# Altium PCB WUT-YJ-4-3-1.PcbDoc (part 10 of 11)
Units mm, origin at the board's own origin, x right, y up, seen from the top; angles counter-clockwise.
Board outline 85 x 56 mm, 4 copper layers (Top Layer, GND_Plane, 3V3_Plane, Bottom Layer); 182 components, 321 nets, 1106 pads, 360 vias.
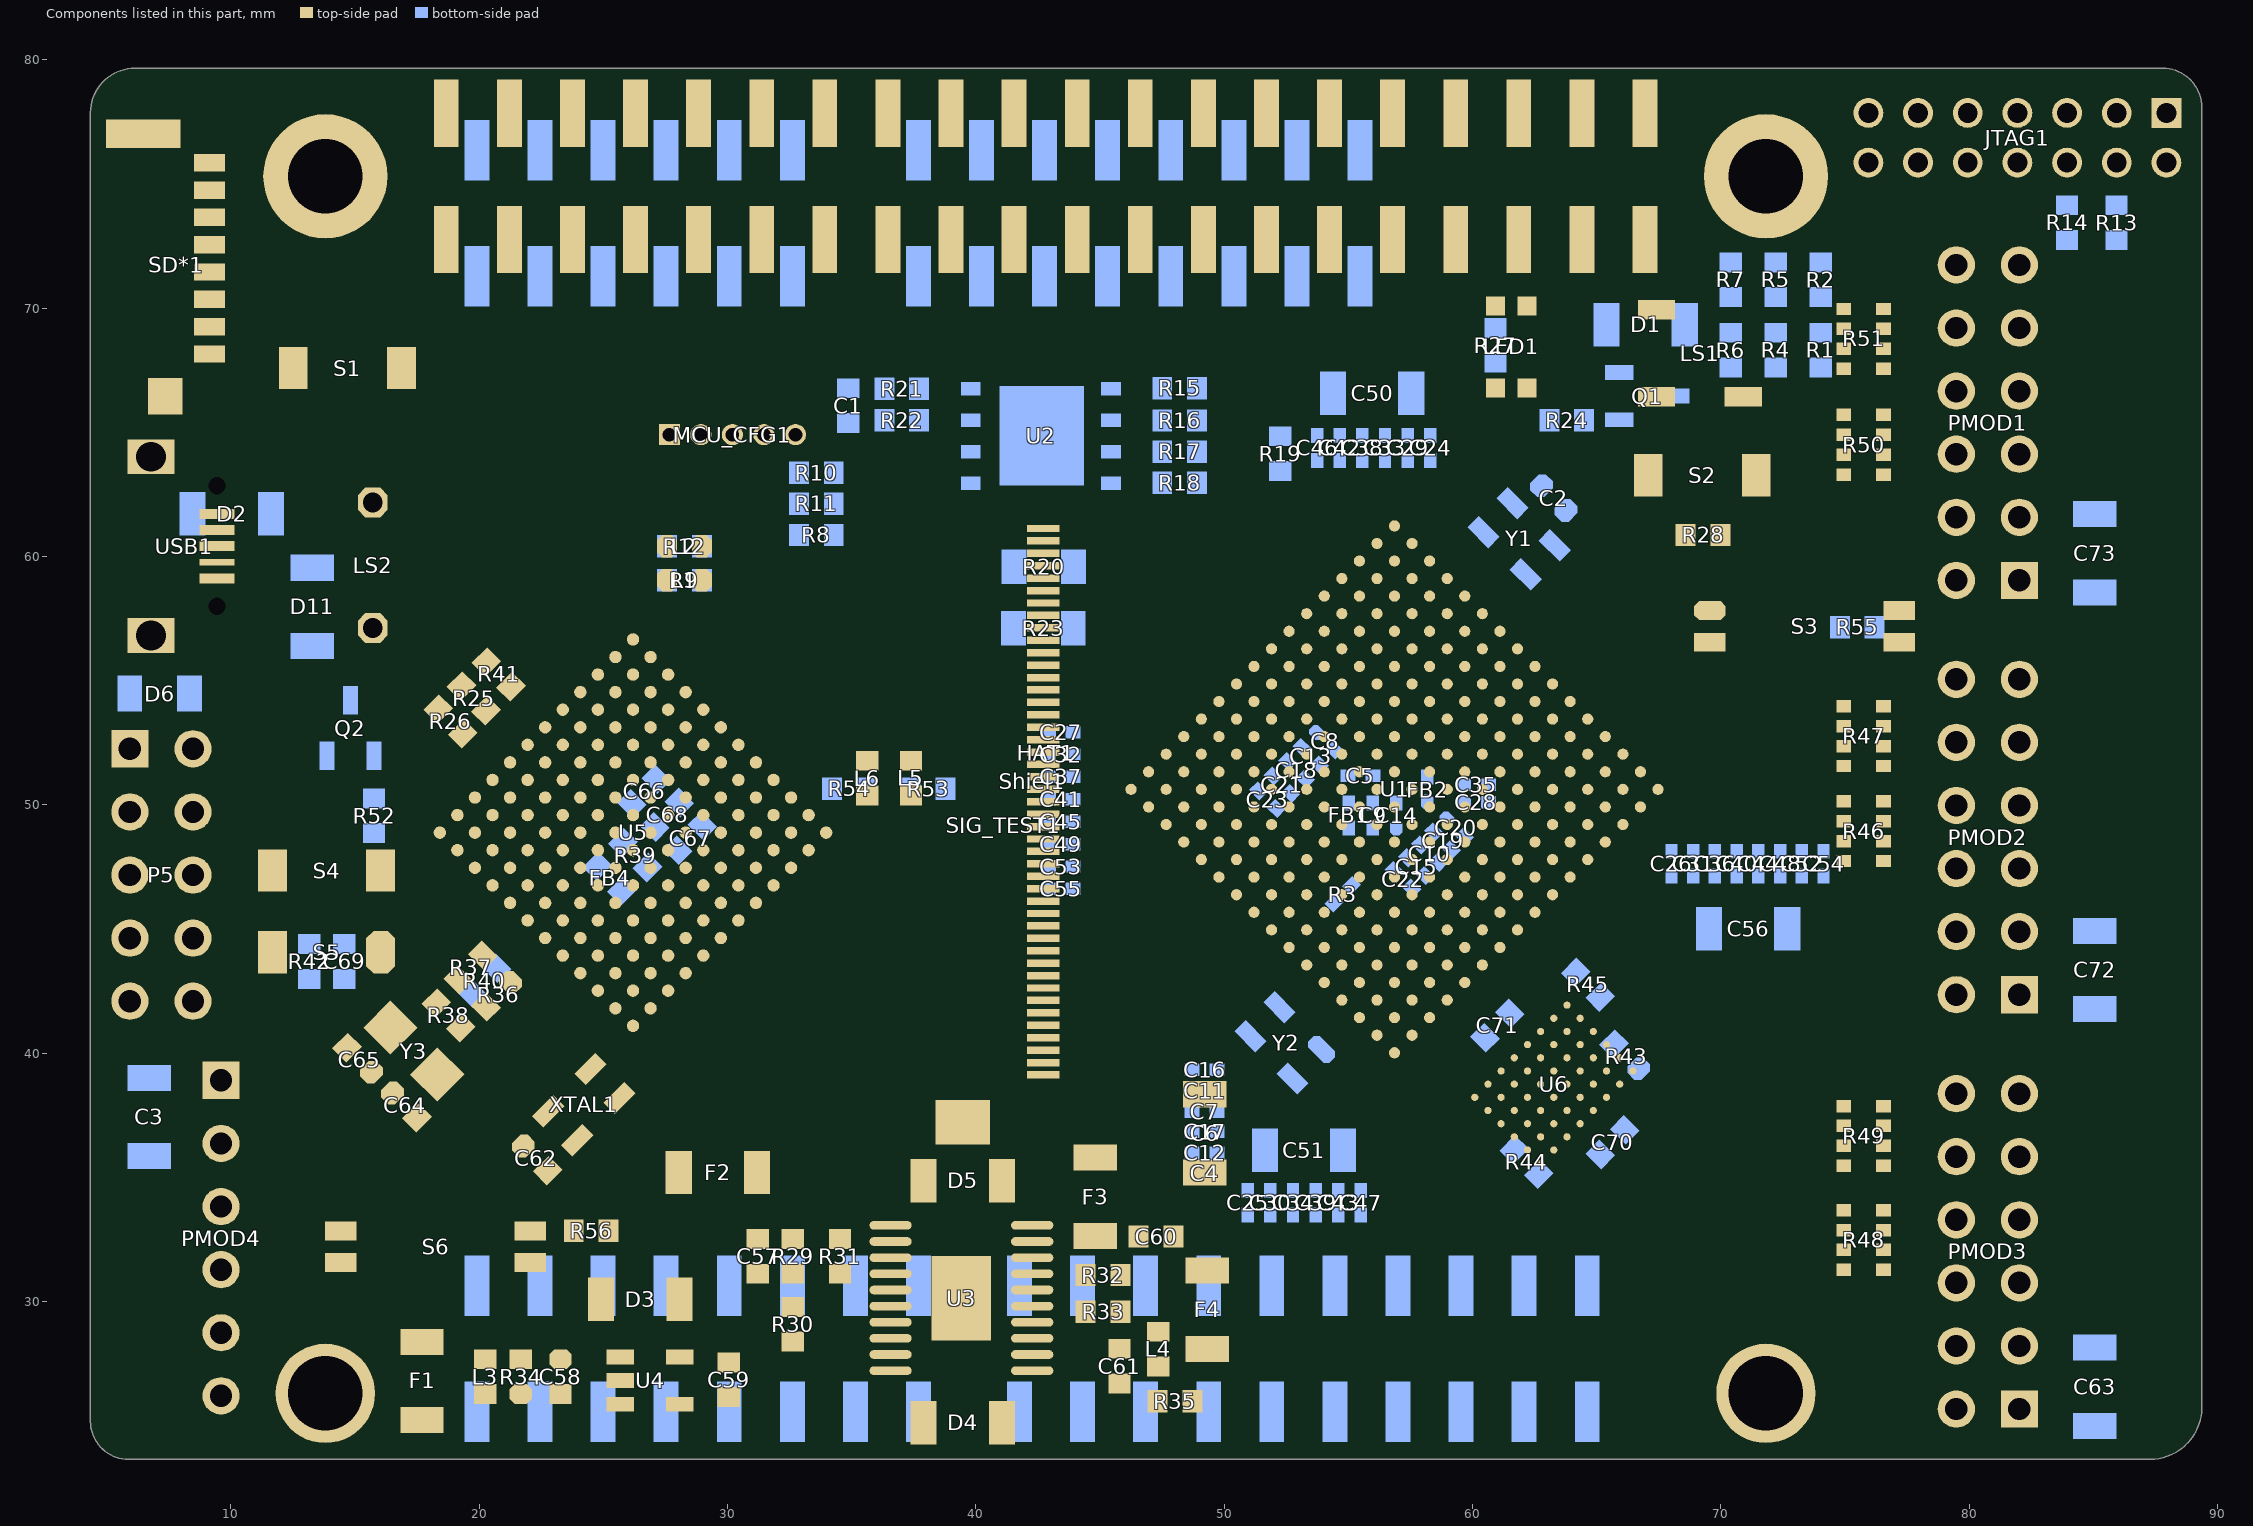
[diagram p12: the components of this part, seen from the top]

## Via types
v1: diameter 0.45, hole 0.2, Top Layer to Bottom Layer, tented both sides, 280 vias
v2: diameter 0.61, hole 0.33, Top Layer to Bottom Layer, tented both sides, 40 vias
v3: diameter 0.403, hole 0.2, Top Layer to Bottom Layer, tented both sides, 15 vias
v4: diameter 0.5, hole 0.2, Top Layer to Bottom Layer, tented both sides, 12 vias
v5: diameter 0.864, hole 0.508, Top Layer to Bottom Layer, tented both sides, 11 vias
v6: diameter 0.864, hole 0.356, Top Layer to Bottom Layer, tented both sides, 1 vias
v7: diameter 0.864, hole 0.381, Top Layer to Bottom Layer, tented both sides, 1 vias

## Nets (pads, with @x,y where several pads share a name; then routed paths per layer and width w, separated by ;. In a path a pad name is that pad's centre, name@x,y a point inside that pad or via, vN(x,y) a via of type N, cw(c..) or ccw(c..) an arc to the next point about the centre after c; other vN are vias at no path point) (continued)
copper on no net: (continued)
  Top Layer w0.025: 86.169,52.752 86.169,52.76 ; 86.169,68.373 86.169,68.406 ; 86.195,50.44 86.195,50.601 ; 86.195,52.777 86.195,52.811 ; 86.195,52.904 86.195,53.065 ; 86.195,68.322 86.195,68.483 ; 86.22,50.44 86.22,50.652 ; 86.22,52.777 86.22,53.116 ; 86.22,68.322 86.22,68.508 ; 86.246,50.516 86.246,50.677 ; 86.246,52.828 86.246,53.141 ; 86.246,68.423 86.246,68.533 ; 86.271,49.399 86.271,49.407 ; 86.271,50.542 86.271,50.703 ; 86.271,52.853 86.271,53.166 ; 86.271,64.791 86.271,64.8 ; 86.271,68.449 86.271,68.584 ; 86.296,49.424 86.296,49.433 ; 86.296,50.567 86.296,50.728 ; 86.296,52.879 86.296,53.141 ; 86.296,59.432 86.296,59.593 ; 86.296,64.817 86.296,64.85 ; 86.296,68.449 86.296,68.635 ; 86.322,49.424 86.322,49.458 ; 86.322,50.567 86.322,50.753 ; 86.322,52.904 86.322,53.116 ; 86.322,59.381 86.322,59.618 ; 86.322,64.817 86.322,64.876 ; 86.322,68.449 86.322,68.635 ; 86.347,47.164 86.347,47.172 ; 86.347,49.45 86.347,49.458 ; 86.347,50.567 86.347,50.779 ; 86.347,52.904 86.347,53.039 ; 86.347,59.33 86.347,59.669 ; 86.347,64.842 86.347,64.927 ; 86.347,67.915 86.347,68.051 ; 86.347,68.449 86.347,68.66 ; 86.373,47.011 86.373,47.274 ; 86.373,49.45 86.373,49.509 ; 86.373,50.567 86.373,50.779 ; 86.373,52.904 86.373,52.963 ; 86.373,59.33 86.373,59.694 ; 86.373,64.842 86.373,64.952 ; 86.373,67.966 86.373,68.127 ; 86.373,68.449 86.373,68.787 ; 86.398,46.935 86.398,47.299 ; 86.398,49.45 86.398,49.56 ; 86.398,49.907 86.398,50.017 ; 86.398,50.567 86.398,50.779 ; 86.398,52.879 86.398,52.938 ; 86.398,53.031 86.398,53.141 ; 86.398,58.898 86.398,59.008 ; 86.398,59.305 86.398,59.339 ; 86.398,59.533 86.398,59.72 ; 86.398,64.842 86.398,65.003 ; 86.398,67.992 86.398,68.127 ; 86.398,68.449 86.398,68.838 ; 86.423,46.808 86.423,47.324 ; 86.423,49.475 86.423,49.585 ; 86.423,49.958 86.423,50.118 ; 86.423,50.542 86.423,50.779 ; 86.423,52.853 86.423,53.217 ; 86.423,58.848 86.423,59.059 ; 86.423,59.279 86.423,59.313 ; 86.423,59.559 86.423,59.745 ; 86.423,64.817 86.423,65.003 ; 86.423,67.992 86.423,68.127 ; 86.423,68.347 86.423,68.838 ; 86.449,46.732 86.449,47.35 ; 86.449,49.475 86.449,49.61 ; 86.449,49.983 86.449,50.144 ; 86.449,50.542 86.449,50.753 ; 86.449,52.828 86.449,53.243 ; 86.449,58.924 86.449,59.085 ; 86.449,59.254 86.449,59.288 ; 86.449,59.584 86.449,59.77 ; 86.449,64.817 86.449,65.028 ; 86.449,65.223 86.449,65.257 ; 86.449,68.017 86.449,68.152 ; 86.449,68.246 86.449,68.838 ; 86.474,46.605 86.474,47.375 ; 86.474,49.475 86.474,49.636 ; 86.474,50.008 86.474,50.169 ; 86.474,50.542 86.474,50.728 ; 86.474,52.777 86.474,53.217 ; 86.474,58.975 86.474,59.135 ; 86.474,59.254 86.474,59.262 ; 86.474,59.584 86.474,59.77 ; 86.474,64.791 86.474,65.028 ; 86.474,65.248 86.474,65.333 ; 86.474,68.042 86.474,68.838 ; 86.5,46.478 86.5,47.401 ; 86.5,49.45 86.5,49.661 ; 86.5,50.008 86.5,50.169 ; 86.5,50.516 86.5,50.728 ; 86.5,52.625 86.5,53.217 ; 86.5,59.025 86.5,59.186 ; 86.5,59.229 86.5,59.262 ; 86.5,59.584 86.5,59.796 ; 86.5,64.766 86.5,65.028 ; 86.5,65.248 86.5,65.435 ; 86.5,68.017 86.5,68.813 ; 86.525,46.376 86.525,46.385 ; 86.525,46.452 86.525,46.994 ; 86.525,47.087 86.525,47.401 ; 86.525,49.45 86.525,49.661 ; 86.525,50.034 86.525,50.169 ; 86.525,50.516 86.525,50.703 ; 86.525,52.65 86.525,53.192 ; 86.525,59.051 86.525,59.237 ; 86.525,59.61 86.525,59.821 ; 86.525,64.74 86.525,65.028 ; 86.525,65.248 86.525,65.435 ; 86.525,67.941 86.525,68.762 ; 86.55,43.836 86.55,43.845 ; 86.55,46.554 86.55,46.893 ; 86.55,47.087 86.55,47.375 ; 86.55,49.45 86.55,49.661 ; 86.55,50.034 86.55,50.169 ; 86.55,50.516 86.55,50.703 ; 86.55,52.675 86.55,53.166 ; 86.55,59.102 86.55,59.262 ; 86.55,59.61 86.55,59.821 ; 86.55,62.124 86.55,62.133 ; 86.55,64.74 86.55,65.003 ; 86.55,65.248 86.55,65.46 ; 86.55,67.839 86.55,68.559 ; 86.576,43.836 86.576,43.895 ; 86.576,46.63 86.576,46.766 ; 86.576,47.087 86.576,47.35 ; 86.576,49.424 86.576,49.636 ; 86.576,50.034 86.576,50.169 ; 86.576,50.516 86.576,50.703 ; 86.576,50.745 86.576,50.83 ; 86.576,52.726 86.576,53.217 ; 86.576,59.102 86.576,59.313 ; 86.576,59.61 86.576,59.821 ; 86.576,62.124 86.576,62.183 ; 86.576,64.715 86.576,64.977 ; 86.576,65.248 86.576,65.46 ; 86.576,67.839 86.576,68.254 ; 86.576,68.373 86.576,68.533 ; 86.601,43.862 86.601,43.921 ; 86.601,46.681 86.601,46.689 ; 86.601,47.087 86.601,47.35 ; 86.601,49.424 86.601,49.585 ; 86.601,50.034 86.601,50.195 ; 86.601,50.491 86.601,50.88 ; 86.601,52.777 86.601,53.268 ; 86.601,59.127 86.601,59.339 ; 86.601,59.61 86.601,59.821 ; 86.601,62.15 86.601,62.209 ; 86.601,64.69 86.601,64.952 ; 86.601,65.223 86.601,65.46 ; 86.601,67.915 86.601,68.178 ; 86.601,68.373 86.601,68.508 ; 86.627,43.862 86.627,43.972 ; 86.627,47.087 86.627,47.324 ; 86.627,49.399 86.627,49.56 ; 86.627,50.059 86.627,50.195 ; 86.627,50.466 86.627,50.906 ; 86.627,52.802 86.627,52.912 ; 86.627,53.107 86.627,53.293 ; 86.627,59.127 86.627,59.339 ; 86.627,59.61 86.627,59.821 ; 86.627,62.15 86.627,62.26 ; 86.627,64.639 86.627,64.952 ; 86.627,65.223 86.627,65.435 ; 86.627,67.966 86.627,68.178 ; 86.627,68.373 86.627,68.508 ; 86.627,68.627 86.627,68.813 ; 86.652,43.887 86.652,43.997 ; 86.652,47.062 86.652,47.299 ; 86.652,49.373 86.652,49.509 ; 86.652,50.059 86.652,50.195 ; 86.652,50.364 86.652,50.906 ; 86.652,53.158 86.652,53.319 ; 86.652,59.152 86.652,59.364 ; 86.652,59.61 86.652,59.821 ; 86.652,62.175 86.652,62.285 ; 86.652,64.613 86.652,64.927 ; 86.652,65.198 86.652,65.409 ; 86.652,68.042 86.652,68.178 ; 86.652,68.347 86.652,68.838 ; 86.677,43.887 86.677,44.022 ; 86.677,47.062 86.677,47.274 ; 86.677,49.348 86.677,49.458 ; 86.677,50.059 86.677,50.195 ; 86.677,50.262 86.677,50.906 ; 86.677,53.158 86.677,53.37 ; 86.677,59.152 86.677,59.364 ; 86.677,59.61 86.677,59.821 ; 86.677,62.175 86.677,62.31 ; 86.677,64.588 86.677,64.876 ; 86.677,65.172 86.677,65.409 ; 86.677,68.068 86.677,68.178 ; 86.677,68.347 86.677,68.838 ; 86.703,43.862 86.703,44.073 ; 86.703,47.037 86.703,47.248 ; 86.703,49.323 86.703,49.407 ; 86.703,50.059 86.703,50.906 ; 86.703,52.574 86.703,52.633 ; 86.703,53.158 86.703,53.37 ; 86.703,59.152 86.703,59.364 ; 86.703,59.61 86.703,59.821 ; 86.703,62.15 86.703,62.361 ; 86.703,64.563 86.703,64.85 ; 86.703,65.147 86.703,65.384 ; 86.703,66.188 86.703,66.374 ; 86.703,68.068 86.703,68.178 ; 86.703,68.322 86.703,68.864 ; 86.703,70.786 86.703,70.794 ; 86.728,43.862 86.728,44.099 ; 86.728,47.037 86.728,47.223 ; 86.728,49.297 86.728,49.382 ; 86.728,50.059 86.728,50.652 ; 86.728,50.796 86.728,50.88 ; 86.728,52.599 86.728,52.76 ; 86.728,53.158 86.728,53.37 ; 86.728,59.152 86.728,59.364 ; 86.728,59.61 86.728,59.821 ; 86.728,62.15 86.728,62.387 ; 86.728,64.537 86.728,64.825 ; 86.728,65.147 86.728,65.358 ; 86.728,66.087 86.728,66.425 ; 86.728,68.093 86.728,68.178 ; 86.728,68.271 86.728,68.864 ; 86.728,70.709 86.728,70.794 ; 86.754,43.887 86.754,44.099 ; 86.754,47.011 86.754,47.197 ; 86.754,49.272 86.754,49.331 ; 86.754,49.78 86.754,49.864 ; 86.754,49.932 86.754,50.601 ; 86.754,52.625 86.754,52.785 ; 86.754,53.133 86.754,53.37 ; 86.754,59.152 86.754,59.364 ; 86.754,59.61 86.754,59.821 ; 86.754,62.175 86.754,62.387 ; 86.754,64.512 86.754,64.774 ; 86.754,65.121 86.754,65.333 ; 86.754,66.036 86.754,66.451 ; 86.754,68.093 86.754,68.864 ; 86.754,70.633 86.754,70.794 ; 86.779,43.887 86.779,44.124 ; 86.779,46.96 86.779,47.248 ; 86.779,49.246 86.779,49.28 ; 86.779,49.805 86.779,50.576 ; 86.779,52.675 86.779,52.811 ; 86.779,53.107 86.779,53.319 ; 86.779,59.152 86.779,59.364 ; 86.779,59.61 86.779,59.821 ; 86.779,62.175 86.779,62.412 ; 86.779,64.486 86.779,64.749 ; 86.779,65.096 86.779,65.333 ; 86.779,65.96 86.779,66.476 ; 86.779,68.093 86.779,68.559 ; 86.779,68.627 86.779,68.838 ; 86.779,70.582 86.779,70.794 ; 86.804,43.862 86.804,44.099 ; 86.804,46.884 86.804,47.248 ; 86.804,49.196 86.804,49.229 ; 86.804,49.881 86.804,50.296 ; 86.804,50.44 86.804,50.576 ; 86.804,52.701 86.804,52.836 ; 86.804,53.082 86.804,53.293 ; 86.804,59.152 86.804,59.364 ; 86.804,59.61 86.804,59.821 ; 86.804,62.15 86.804,62.387 ; 86.804,64.461 86.804,64.723 ; 86.804,65.071 86.804,65.308 ; 86.804,65.909 86.804,66.476 ; 86.804,68.068 86.804,68.483 ; 86.804,68.627 86.804,68.838 ; 86.804,70.582 86.804,70.794 ; 86.83,43.862 86.83,44.073 ; 86.83,46.757 86.83,47.248 ; 86.83,49.17 86.83,49.179 ; 86.83,49.907 86.83,50.22 ; 86.83,50.44 86.83,50.55 ; 86.83,52.701 86.83,52.862 ; 86.83,53.082 86.83,53.243 ; 86.83,59.178 86.83,59.364 ; 86.83,59.61 86.83,59.821 ; 86.83,62.15 86.83,62.361 ; 86.83,64.436 86.83,64.673 ; 86.83,65.045 86.83,65.257 ; 86.83,65.858 86.83,66.171 ; 86.83,66.29 86.83,66.501 ; 86.83,67.738 86.83,67.746 ; 86.83,68.017 86.83,68.381 ; 86.83,68.627 86.83,68.838 ; 86.83,70.582 86.83,70.794 ; 86.855,43.836 86.855,44.048 ; 86.855,46.656 86.855,47.197 ; 86.855,49.119 86.855,49.153 ; 86.855,49.932 86.855,50.195 ; 86.855,50.415 86.855,50.525 ; 86.855,52.701 86.855,52.862 ; 86.855,53.056 86.855,53.649 ; 86.855,59.178 86.855,59.364 ; 86.855,59.61 86.855,59.821 ; 86.855,62.124 86.855,62.336 ; 86.855,64.41 86.855,64.647 ; 86.855,65.02 86.855,65.231 ; 86.855,65.782 86.855,66.095 ; 86.855,66.341 86.855,66.527 ; 86.855,67.661 86.855,67.873 ; 86.855,67.966 86.855,68.33 ; 86.855,68.627 86.855,68.813 ; 86.855,70.582 86.855,70.794 ; 86.881,43.836 86.881,44.022 ; 86.881,46.63 86.881,47.121 ; 86.881,49.069 86.881,49.102 ; 86.881,50.034 86.881,50.195 ; 86.881,50.415 86.881,50.499 ; 86.881,52.726 86.881,52.862 ; 86.881,53.031 86.881,53.7 ; 86.881,59.178 86.881,59.364 ; 86.881,59.61 86.881,59.821 ; 86.881,62.124 86.881,62.31 ; 86.881,64.385 86.881,64.622 ; 86.881,64.994 86.881,65.206 ; 86.881,65.731 86.881,66.044 ; 86.881,66.341 86.881,66.527 ; 86.881,67.738 86.881,68.051 ; 86.881,68.093 86.881,68.33 ; 86.881,68.652 86.881,68.813 ; 86.881,70.582 86.881,70.769 ; 86.906,43.836 86.906,44.022 ; 86.906,46.757 86.906,47.02 ; 86.906,49.043 86.906,49.052 ; 86.906,50.059 86.906,50.195 ; 86.906,50.415 86.906,50.499 ; 86.906,52.726 86.906,53.725 ; 86.906,59.178 86.906,59.364 ; 86.906,59.61 86.906,59.821 ; 86.906,62.124 86.906,62.31 ; 86.906,64.359 86.906,64.596 ; 86.906,64.969 86.906,65.155 ; 86.906,65.68 86.906,66.019 ; 86.906,66.366 86.906,66.552 ; 86.906,67.763 86.906,67.949 ; 86.906,68.195 86.906,68.33 ; 86.906,68.627 86.906,68.813 ; 86.906,70.582 86.906,70.769 ; 86.931,43.836 86.931,43.997 ; 86.931,46.783 86.931,46.994 ; 86.931,49.018 86.931,49.026 ; 86.931,50.085 86.931,50.195 ; 86.931,50.389 86.931,50.474 ; 86.931,52.726 86.931,53.751 ; 86.931,59.178 86.931,59.364 ; 86.931,59.61 86.931,59.821 ; 86.931,62.124 86.931,62.285 ; 86.931,64.334 86.931,64.546 ; 86.931,64.969 86.931,65.13 ; 86.931,65.604 86.931,65.968 ; 86.931,66.366 86.931,66.552 ; 86.931,67.788 86.931,67.975 ; 86.931,68.195 86.931,68.33 ; 86.931,68.627 86.931,68.787 ; 86.931,70.557 86.931,70.769 ; 86.957,43.811 86.957,43.997 ; 86.957,46.122 86.957,46.181 ; 86.957,46.884 86.957,47.02 ; 86.957,49.018 86.957,49.026 ; 86.957,50.085 86.957,50.195 ; 86.957,50.389 86.957,50.474 ; 86.957,52.65 86.957,53.776 ; 86.957,59.178 86.957,59.364 ; 86.957,59.61 86.957,59.821 ; 86.957,62.099 86.957,62.285 ; 86.957,64.309 86.957,64.546 ; 86.957,64.918 86.957,65.104 ; 86.957,65.553 86.957,65.917 ; 86.957,66.366 86.957,66.552 ; 86.957,67.814 86.957,67.975 ; 86.957,68.22 86.957,68.33 ; 86.957,68.627 86.957,68.787 ; 86.957,70.557 86.957,70.769 ; 86.982,43.811 86.982,43.972 ; 86.982,46.148 86.982,46.308 ; 86.982,46.91 86.982,47.045 ; 86.982,48.992 86.982,49.026 ; 86.982,50.085 86.982,50.195 ; 86.982,50.364 86.982,50.449 ; 86.982,52.574 86.982,53.776 ; 86.982,59.178 86.982,59.364 ; 86.982,59.61 86.982,59.821 ; 86.982,59.864 86.982,60.024 ; 86.982,62.099 86.982,62.26 ; 86.982,64.258 86.982,64.622 ; 86.982,64.893 86.982,65.054 ; 86.982,65.426 86.982,65.892 ; 86.982,66.366 86.982,66.552 ; 86.982,67.814 86.982,67.975 ; 86.982,68.22 86.982,68.33 ; 86.982,68.627 86.982,68.787 ; 86.982,70.557 86.982,70.769 ; 87.008,43.785 87.008,43.972 ; 87.008,46.148 87.008,46.359 ; 87.008,46.935 87.008,47.07 ; 87.008,49.018 87.008,49.026 ; 87.008,50.11 87.008,50.195 ; 87.008,50.364 87.008,50.423 ; 87.008,50.669 87.008,50.83 ; 87.008,52.472 87.008,53.776 ; 87.008,59.178 87.008,59.364 ; 87.008,59.61 87.008,60.202 ; 87.008,62.073 87.008,62.26 ; 87.008,64.232 87.008,64.419 ; 87.008,64.512 87.008,64.698 ; 87.008,64.817 87.008,65.003 ; 87.008,65.452 87.008,65.841 ; 87.008,66.366 87.008,66.552 ; 87.008,67.839 87.008,68 ; 87.008,68.22 87.008,68.33 ; 87.008,68.601 87.008,68.762 ; 87.008,70.557 87.008,70.769 ; 87.033,43.785 87.033,43.972 ; 87.033,46.173 87.033,46.385 ; 87.033,46.935 87.033,47.096 ; 87.033,49.018 87.033,49.052 ; 87.033,50.135 87.033,50.195 ; 87.033,50.339 87.033,50.423 ; 87.033,50.542 87.033,50.88 ; 87.033,52.345 87.033,53.039 ; 87.033,53.641 87.033,53.751 ; 87.033,59.178 87.033,59.364 ; 87.033,59.61 87.033,60.253 ; 87.033,62.073 87.033,62.26 ; 87.033,64.207 87.033,64.368 ; 87.033,64.537 87.033,64.698 ; 87.033,64.791 87.033,64.952 ; 87.033,65.477 87.033,65.816 ; 87.033,66.366 87.033,66.552 ; 87.033,67.839 87.033,68 ; 87.033,68.22 87.033,68.356 ; 87.033,68.601 87.033,68.762 ; 87.033,70.557 87.033,70.769 ; 87.058,43.785 87.058,43.946 ; 87.058,46.173 87.058,46.385 ; 87.058,46.96 87.058,47.121 ; 87.058,49.043 87.058,49.077 ; 87.058,50.135 87.058,50.195 ; 87.058,50.313 87.058,50.906 ; 87.058,52.091 87.058,52.912 ; 87.058,53.742 87.058,53.751 ; 87.058,59.178 87.058,59.364 ; 87.058,59.508 87.058,60.278 ; 87.058,62.073 87.058,62.234 ; 87.058,64.156 87.058,64.342 ; 87.058,64.537 87.058,64.723 ; 87.058,64.791 87.058,65.028 ; 87.058,65.477 87.058,65.765 ; 87.058,66.366 87.058,66.552 ; 87.058,67.814 87.058,68 ; 87.058,68.246 87.058,68.406 ; 87.058,68.601 87.058,68.737 ; 87.058,70.557 87.058,70.743 ; 87.084,43.785 87.084,43.946 ; 87.084,46.173 87.084,46.385 ; 87.084,46.96 87.084,47.147 ; 87.084,49.043 87.084,49.128 ; 87.084,50.161 87.084,50.195 ; 87.084,50.288 87.084,50.931 ; 87.084,52.04 87.084,52.785 ; 87.084,58.39 87.084,58.424 ; 87.084,59.152 87.084,60.278 ; 87.084,62.073 87.084,62.234 ; 87.084,64.105 87.084,64.266 ; 87.084,64.563 87.084,64.723 ; 87.084,64.791 87.084,65.079 ; 87.084,65.477 87.084,65.485 ; 87.084,65.553 87.084,65.739 ; 87.084,66.341 87.084,66.527 ; 87.084,67.814 87.084,68 ; 87.084,68.246 87.084,68.432 ; 87.084,68.576 87.084,68.737 ; 87.084,70.557 87.084,70.743 ; 87.109,43.76 87.109,43.921 ; 87.109,46.198 87.109,46.385 ; 87.109,46.986 87.109,47.172 ; 87.109,47.519 87.109,47.553 ; 87.109,49.069 87.109,49.204 ; 87.109,50.161 87.109,50.931 ; 87.109,52.015 87.109,52.023 ; 87.109,52.244 87.109,52.684 ; 87.109,53.158 87.109,53.344 ; 87.109,58.416 87.109,58.526 ; 87.109,59.152 87.109,60.304 ; 87.109,62.048 87.109,62.209 ; 87.109,64.08 87.109,64.215 ; 87.109,64.563 87.109,64.749 ; 87.109,64.817 87.109,65.104 ; 87.109,65.452 87.109,65.485 ; 87.109,65.579 87.109,65.739 ; 87.109,66.341 87.109,66.527 ; 87.109,67.839 87.109,68 ; 87.109,68.246 87.109,68.432 ; 87.109,68.576 87.109,68.737 ; 87.109,70.557 87.109,70.743 ; 87.135,43.76 87.135,43.921 ; 87.135,46.198 87.135,46.385 ; 87.135,46.986 87.135,47.172 ; 87.135,47.367 87.135,47.705 ; 87.135,49.069 87.135,49.255 ; 87.135,50.085 87.135,50.906 ; 87.135,52.294 87.135,52.582 ; 87.135,53.056 87.135,53.37 ; 87.135,58.441 87.135,58.577 ; 87.135,59.102 87.135,60.278 ; 87.135,62.048 87.135,62.209 ; 87.135,64.029 87.135,64.165 ; 87.135,64.563 87.135,64.749 ; 87.135,64.918 87.135,65.104 ; 87.135,65.426 87.135,65.46 ; 87.135,65.604 87.135,65.739 ; 87.135,66.341 87.135,66.527 ; 87.135,67.839 87.135,68 ; 87.135,68.22 87.135,68.457 ; 87.135,68.55 87.135,68.711 ; 87.135,70.557 87.135,70.743 ; 87.16,43.76 87.16,43.921 ; 87.16,46.198 87.16,46.359 ; 87.16,47.011 87.16,47.197 ; 87.16,47.341 87.16,47.782 ; 87.16,49.094 87.16,49.306 ; 87.16,49.983 87.16,50.88 ; 87.16,52.32 87.16,52.506 ; 87.16,52.955 87.16,53.37 ; 87.16,58.467 87.16,58.627 ; 87.16,59.025 87.16,60.278 ; 87.16,62.048 87.16,62.209 ; 87.16,64.563 87.16,64.749 ; 87.16,64.944 87.16,65.104 ; 87.16,65.426 87.16,65.46 ; 87.16,65.604 87.16,65.739 ; 87.16,66.341 87.16,66.527 ; 87.16,67.839 87.16,68 ; 87.16,68.22 87.16,68.711 ; 87.16,70.557 87.16,70.743 ; 87.185,43.735 87.185,43.895 ; 87.185,46.198 87.185,46.359 ; 87.185,47.011 87.185,47.197 ; 87.185,47.265 87.185,47.832 ; 87.185,49.119 87.185,49.331 ; 87.185,49.805 87.185,50.626 ; 87.185,50.796 87.185,50.83 ; 87.185,52.853 87.185,53.37 ; 87.185,58.492 87.185,58.653 ; 87.185,58.924 87.185,60.253 ; 87.185,62.023 87.185,62.183 ; 87.185,64.563 87.185,64.749 ; 87.185,64.944 87.185,65.104 ; 87.185,65.401 87.185,65.46 ; 87.185,65.629 87.185,65.765 ; 87.185,66.341 87.185,66.501 ; 87.185,67.865 87.185,68 ; 87.185,68.195 87.185,68.711 ; 87.185,70.557 87.185,70.743 ; 87.211,43.735 87.211,43.895 ; 87.211,46.198 87.211,46.359 ; 87.211,47.011 87.211,47.858 ; 87.211,49.119 87.211,49.356 ; 87.211,49.678 87.211,50.525 ; 87.211,52.599 87.211,52.633 ; 87.211,52.777 87.211,53.37 ; 87.211,58.517 87.211,58.729 ; 87.211,58.797 87.211,60.228 ; 87.211,62.023 87.211,62.183 ; 87.211,64.563 87.211,64.749 ; 87.211,64.944 87.211,65.104 ; 87.211,65.375 87.211,65.435 ; 87.211,65.629 87.211,65.765 ; 87.211,66.341 87.211,66.501 ; 87.211,67.865 87.211,68 ; 87.211,68.144 87.211,68.686 ; 87.211,70.532 87.211,70.743 ; 87.236,43.709 87.236,43.921 ; 87.236,46.198 87.236,46.359 ; 87.236,47.011 87.236,47.832 ; 87.236,49.145 87.236,49.382 ; 87.236,49.602 87.236,49.636 ; 87.236,49.805 87.236,50.474 ; 87.236,52.574 87.236,53.37 ; 87.236,58.517 87.236,59.796 ; 87.236,61.997 87.236,62.209 ; 87.236,64.563 87.236,64.749 ; 87.236,64.944 87.236,65.104 ; 87.236,65.35 87.236,65.435 ; 87.236,65.629 87.236,65.765 ; 87.236,66.341 87.236,66.501 ; 87.236,67.89 87.236,68.356 ; 87.236,68.474 87.236,68.686 ; 87.236,70.532 87.236,70.743 ; 87.262,43.709 87.262,43.946 ; 87.262,46.198 87.262,46.359 ; 87.262,46.935 87.262,47.782 ; 87.262,49.145 87.262,49.382 ; 87.262,49.856 87.262,50.245 ; 87.262,50.415 87.262,50.525 ; 87.262,52.574 87.262,53.37 ; 87.262,58.517 87.262,59.466 ; 87.262,59.559 87.262,59.796 ; 87.262,61.997 87.262,62.234 ; 87.262,64.563 87.262,64.749 ; 87.262,64.944 87.262,65.104 ; 87.262,65.35 87.262,65.409 ; 87.262,65.629 87.262,65.765 ; 87.262,66.315 87.262,66.476 ; 87.262,67.89 87.262,68 ; 87.262,68.042 87.262,68.33 ; 87.262,68.474 87.262,68.686 ; 87.262,70.532 87.262,70.743 ; 87.287,43.684 87.287,43.972 ; 87.287,46.198 87.287,46.359 ; 87.287,46.833 87.287,47.502 ; 87.287,49.145 87.287,49.382 ; 87.287,49.881 87.287,50.118 ; 87.287,50.415 87.287,50.601 ; 87.287,52.548 87.287,52.76 ; 87.287,52.802 87.287,52.963 ; 87.287,53.133 87.287,53.37 ; 87.287,58.492 87.287,59.364 ; 87.287,59.584 87.287,59.796 ; 87.287,61.972 87.287,62.26 ; 87.287,64.588 87.287,64.749 ; 87.287,64.969 87.287,65.104 ; 87.287,65.325 87.287,65.409 ; 87.287,65.629 87.287,65.765 ; 87.287,66.315 87.287,66.476 ; 87.287,67.915 87.287,67.975 ; 87.287,68.042 87.287,68.33 ; 87.287,68.474 87.287,69.168 ; 87.287,70.532 87.287,70.718 ; 87.312,43.684 87.312,44.022 ; 87.312,46.198 87.312,46.359 ; 87.312,46.757 87.312,47.324 ; 87.312,49.145 87.312,49.356 ; 87.312,50.034 87.312,50.093 ; 87.312,50.466 87.312,50.626 ; 87.312,52.548 87.312,52.76 ; 87.312,52.853 87.312,52.963 ; 87.312,53.158 87.312,53.37 ; 87.312,58.39 87.312,59.059 ; 87.312,59.152 87.312,59.339 ; 87.312,59.584 87.312,59.77 ; 87.312,61.972 87.312,62.31 ; 87.312,64.588 87.312,64.749 ; 87.312,64.969 87.312,65.104 ; 87.312,65.299 87.312,65.409 ; 87.312,65.629 87.312,65.765 ; 87.312,66.315 87.312,66.476 ; 87.312,67.941 87.312,68.33 ; 87.312,68.398 87.312,69.27 ; 87.312,70.532 87.312,70.718 ; 87.338,43.658 87.338,43.845 ; 87.338,43.887 87.338,44.048 ; 87.338,46.198 87.338,46.359 ; 87.338,46.681 87.338,47.274 ; 87.338,49.145 87.338,49.356 ; 87.338,49.526 87.338,49.534 ; 87.338,50.034 87.338,50.144 ; 87.338,50.466 87.338,50.677 ; 87.338,52.548 87.338,52.76 ; 87.338,52.879 87.338,52.963 ; 87.338,53.158 87.338,53.37 ; 87.338,58.263 87.338,58.958 ; 87.338,59.152 87.338,59.339 ; 87.338,59.584 87.338,59.77 ; 87.338,61.946 87.338,62.133 ; 87.338,62.175 87.338,62.336 ; 87.338,64.588 87.338,64.749 ; 87.338,64.969 87.338,65.104 ; 87.338,65.299 87.338,65.384 ; 87.338,65.629 87.338,65.765 ; 87.338,66.315 87.338,66.476 ; 87.338,67.941 87.338,68.025 ; 87.338,68.068 87.338,69.321 ; 87.338,70.532 87.338,70.718 ; 87.363,43.658 87.363,43.819 ; 87.363,43.912 87.363,44.073 ; 87.363,46.198 87.363,46.334 ; 87.363,46.605 87.363,47.274 ; 87.363,49.145 87.363,49.331 ; 87.363,49.526 87.363,49.534 ; 87.363,50.059 87.363,50.195 ; 87.363,50.466 87.363,50.677 ; 87.363,52.574 87.363,52.76 ; 87.363,52.904 87.363,52.989 ; 87.363,53.158 87.363,53.37 ; 87.363,58.086 87.363,58.856 ; 87.363,59.152 87.363,59.364 ; 87.363,59.584 87.363,59.77 ; 87.363,61.946 87.363,62.107 ; 87.363,62.2 87.363,62.361 ; 87.363,64.588 87.363,64.749 ; 87.363,64.969 87.363,65.104 ; 87.363,65.274 87.363,65.384 ; 87.363,65.629 87.363,65.765 ; 87.363,66.29 87.363,66.451 ; 87.363,67.915 87.363,67.949 ; 87.363,68.068 87.363,69.346 ; 87.363,70.532 87.363,70.718 ; 87.389,43.633 87.389,43.819 ; 87.389,43.938 87.389,44.073 ; 87.389,46.198 87.389,46.334 ; 87.389,46.529 87.389,46.994 ; 87.389,47.087 87.389,47.274 ; 87.389,49.145 87.389,49.331 ; 87.389,49.526 87.389,49.534 ; 87.389,50.085 87.389,50.22 ; 87.389,50.466 87.389,50.677 ; 87.389,52.574 87.389,52.76 ; 87.389,52.904 87.389,53.014 ; 87.389,53.158 87.389,53.37 ; 87.389,58.187 87.389,58.805 ; 87.389,59.152 87.389,59.364 ; 87.389,59.584 87.389,59.77 ; 87.389,61.921 87.389,62.107 ; 87.389,62.226 87.389,62.361 ; 87.389,64.588 87.389,64.749 ; 87.389,64.969 87.389,65.104 ; 87.389,65.248 87.389,65.358 ; 87.389,65.629 87.389,65.765 ; 87.389,66.29 87.389,66.451 ; 87.389,67.865 87.389,67.898 ; 87.389,68.068 87.389,69.372 ; 87.389,70.532 87.389,70.718 ; 87.414,43.608 87.414,43.794 ; 87.414,43.938 87.414,44.099 ; 87.414,46.173 87.414,46.893 ; 87.414,47.113 87.414,47.274 ; 87.414,49.145 87.414,49.331 ; 87.414,49.5 87.414,49.534 ; 87.414,50.085 87.414,50.22 ; 87.414,50.466 87.414,50.677 ; 87.414,52.574 87.414,52.76 ; 87.414,52.904 87.414,53.014 ; 87.414,53.158 87.414,53.37 ; 87.414,58.263 87.414,58.754 ; 87.414,59.178 87.414,59.364 ; 87.414,59.584 87.414,59.77 ; 87.414,61.896 87.414,62.082 ; 87.414,62.226 87.414,62.387 ; 87.414,64.588 87.414,64.749 ; 87.414,64.969 87.414,65.104 ; 87.414,65.248 87.414,65.358 ; 87.414,65.629 87.414,65.765 ; 87.414,66.29 87.414,66.451 ; 87.414,67.814 87.414,67.822 ; 87.414,67.992 87.414,69.397 ; 87.414,70.532 87.414,70.718 ; 87.439,43.582 87.439,43.794 ; 87.439,43.963 87.439,44.124 ; 87.439,46.198 87.439,46.816 ; 87.439,47.113 87.439,47.299 ; 87.439,49.145 87.439,49.306 ; 87.439,49.5 87.439,49.534 ; 87.439,50.085 87.439,50.245 ; 87.439,50.466 87.439,50.677 ; 87.439,50.745 87.439,51.084 ; 87.439,52.574 87.439,52.76 ; 87.439,52.904 87.439,53.014 ; 87.439,53.158 87.439,53.37 ; 87.439,58.314 87.439,58.754 ; 87.439,59.152 87.439,59.339 ; 87.439,59.584 87.439,59.745 ; 87.439,61.87 87.439,62.082 ; 87.439,62.251 87.439,62.412 ; 87.439,64.588 87.439,64.749 ; 87.439,64.969 87.439,65.104 ; 87.439,65.223 87.439,65.358 ; 87.439,65.655 87.439,65.765 ; 87.439,66.264 87.439,66.451 ; 87.439,67.915 87.439,69.372 ; 87.439,70.532 87.439,70.718 ; 87.465,43.582 87.465,43.768 ; 87.465,43.963 87.465,44.149 ; 87.465,46.198 87.465,46.74 ; 87.465,47.138 87.465,47.299 ; 87.465,49.145 87.465,49.306 ; 87.465,49.5 87.465,49.534 ; 87.465,50.085 87.465,50.22 ; 87.465,50.466 87.465,51.134 ; 87.465,52.574 87.465,52.76 ; 87.465,52.904 87.465,53.014 ; 87.465,53.158 87.465,53.37 ; 87.465,58.365 87.465,58.754 ; 87.465,59.152 87.465,59.339 ; 87.465,59.584 87.465,59.745 ; 87.465,61.87 87.465,62.056 ; 87.465,62.251 87.465,62.437 ; 87.465,64.588 87.465,64.749 ; 87.465,64.969 87.465,65.104 ; 87.465,65.198 87.465,65.333 ; 87.465,65.655 87.465,65.765 ; 87.465,66.264 87.465,66.425 ; 87.465,67.814 87.465,68.66 ; 87.465,69.084 87.465,69.346 ; 87.465,70.532 87.465,70.718 ; 87.49,43.557 87.49,43.743 ; 87.49,43.989 87.49,44.175 ; 87.49,46.198 87.49,46.689 ; 87.49,47.138 87.49,47.324 ; 87.49,49.145 87.49,49.306 ; 87.49,49.475 87.49,49.534 ; 87.49,50.085 87.49,50.22 ; 87.49,50.466 87.49,51.16 ; 87.49,52.574 87.49,52.76 ; 87.49,52.904 87.49,53.014 ; 87.49,53.158 87.49,53.344 ; 87.49,58.568 87.49,58.754 ; 87.49,59.178 87.49,59.339 ; 87.49,59.584 87.49,59.745 ; 87.49,61.845 87.49,62.031 ; 87.49,62.277 87.49,62.463 ; 87.49,64.588 87.49,64.723 ; 87.49,64.944 87.49,65.104 ; 87.49,65.198 87.49,65.333 ; 87.49,65.655 87.49,65.765 ; 87.49,66.239 87.49,66.425 ; 87.49,67.738 87.49,68.635 ; 87.49,69.185 87.49,69.295 ; 87.49,70.532 87.49,70.718 ; 87.516,43.557 87.516,43.743 ; 87.516,43.989 87.516,44.2 ; 87.516,46.198 87.516,46.613 ; 87.516,47.164 87.516,47.324 ; 87.516,49.145 87.516,49.306 ; 87.516,49.475 87.516,49.534 ; 87.516,50.085 87.516,50.22 ; 87.516,50.339 87.516,51.185 ; 87.516,52.574 87.516,52.76 ; 87.516,52.904 87.516,53.014 ; 87.516,53.158 87.516,53.344 ; 87.516,58.568 87.516,58.754 ; 87.516,59.203 87.516,59.339 ; 87.516,59.584 87.516,59.745 ; 87.516,61.845 87.516,62.031 ; 87.516,62.277 87.516,62.488 ; 87.516,64.588 87.516,64.723 ; 87.516,64.944 87.516,65.104 ; 87.516,65.172 87.516,65.333 ; 87.516,65.655 87.516,65.79 ; 87.516,65.985 87.516,66.044 ; 87.516,66.214 87.516,66.425 ; 87.516,67.306 87.516,67.416 ; 87.516,67.636 87.516,68.356 ; 87.516,68.525 87.516,68.686 ; 87.516,70.532 87.516,70.718 ; 87.541,43.531 87.541,43.718 ; 87.541,44.014 87.541,44.226 ; 87.541,46.198 87.541,46.562 ; 87.541,47.164 87.541,47.324 ; 87.541,49.145 87.541,49.28 ; 87.541,49.475 87.541,49.534 ; 87.541,50.085 87.541,51.211 ; 87.541,52.574 87.541,52.76 ; 87.541,52.904 87.541,53.014 ; 87.541,53.158 87.541,53.344 ; 87.541,58.568 87.541,58.754 ; 87.541,59.203 87.541,59.339 ; 87.541,59.584 87.541,59.745 ; 87.541,61.819 87.541,62.006 ; 87.541,62.302 87.541,62.514 ; 87.541,64.588 87.541,64.723 ; 87.541,64.944 87.541,65.104 ; 87.541,65.147 87.541,65.308 ; 87.541,65.655 87.541,65.79 ; 87.541,66.01 87.541,66.4 ; 87.541,67.306 87.541,67.441 ; 87.541,67.56 87.541,68.229 ; 87.541,68.55 87.541,68.737 ; 87.541,70.532 87.541,70.718 ; 87.566,43.531 87.566,43.718 ; 87.566,44.039 87.566,44.251 ; 87.566,46.198 87.566,46.334 ; 87.566,46.376 87.566,46.512 ; 87.566,47.189 87.566,47.35 ; 87.566,49.119 87.566,49.28 ; 87.566,49.45 87.566,49.585 ; 87.566,50.085 87.566,51.211 ; 87.566,52.574 87.566,52.76 ; 87.566,52.904 87.566,53.014 ; 87.566,53.133 87.566,53.344 ; 87.566,58.568 87.566,58.754 ; 87.566,59.229 87.566,59.339 ; 87.566,59.584 87.566,59.745 ; 87.566,61.819 87.566,62.006 ; 87.566,62.327 87.566,62.539 ; 87.566,64.588 87.566,64.723 ; 87.566,64.944 87.566,65.104 ; 87.566,65.147 87.566,65.308 ; 87.566,65.655 87.566,65.79 ; 87.566,66.01 87.566,66.4 ; 87.566,67.28 87.566,67.39 ; 87.566,67.484 87.566,68.178 ; 87.566,68.576 87.566,68.762 ; 87.566,70.532 87.566,70.718 ; 87.592,43.531 87.592,43.692 ; 87.592,44.039 87.592,44.276 ; 87.592,46.198 87.592,46.308 ; 87.592,46.402 87.592,46.461 ; 87.592,47.189 87.592,47.35 ; 87.592,49.119 87.592,49.28 ; 87.592,49.45 87.592,49.509 ; 87.592,49.577 87.592,49.687 ; 87.592,50.008 87.592,50.83 ; 87.592,50.999 87.592,51.236 ; 87.592,52.574 87.592,52.76 ; 87.592,52.904 87.592,53.09 ; 87.592,53.133 87.592,53.344 ; 87.592,58.594 87.592,58.754 ; 87.592,59.229 87.592,59.339 ; 87.592,59.584 87.592,59.72 ; 87.592,61.819 87.592,61.98 ; 87.592,62.327 87.592,62.564 ; 87.592,64.588 87.592,64.723 ; 87.592,64.944 87.592,65.308 ; 87.592,65.655 87.592,65.79 ; 87.592,66.036 87.592,66.374 ; 87.592,67.306 87.592,68.178 ; 87.592,68.601 87.592,68.864 ; 87.592,70.532 87.592,70.718 ; 87.617,43.506 87.617,43.667 ; 87.617,44.065 87.617,44.302 ; 87.617,46.198 87.617,46.308 ; 87.617,47.214 87.617,47.35 ; 87.617,49.119 87.617,49.28 ; 87.617,49.45 87.617,49.509 ; 87.617,49.602 87.617,49.763 ; 87.617,49.932 87.617,50.652 ; 87.617,51.024 87.617,51.261 ; 87.617,52.574 87.617,52.76 ; 87.617,52.904 87.617,53.344 ; 87.617,58.594 87.617,58.754 ; 87.617,59.254 87.617,59.339 ; 87.617,59.584 87.617,59.72 ; 87.617,61.794 87.617,61.955 ; 87.617,62.353 87.617,62.59 ; 87.617,64.588 87.617,64.723 ; 87.617,64.944 87.617,65.308 ; 87.617,65.655 87.617,65.79 ; 87.617,66.061 87.617,66.374 ; 87.617,67.306 87.617,68.152 ; 87.617,68.627 87.617,68.914 ; 87.617,70.532 87.617,70.692 ; 87.643,43.481 87.643,43.667 ; 87.643,44.065 87.643,44.302 ; 87.643,46.198 87.643,46.308 ; 87.643,47.214 87.643,47.375 ; 87.643,49.119 87.643,49.255 ; 87.643,49.424 87.643,49.509 ; 87.643,49.602 87.643,49.788 ; 87.643,49.907 87.643,50.626 ; 87.643,51.024 87.643,51.236 ; 87.643,52.574 87.643,52.76 ; 87.643,52.904 87.643,53.319 ; 87.643,53.666 87.643,53.954 ; 87.643,58.594 87.643,58.754 ; 87.643,59.279 87.643,59.339 ; 87.643,59.432 87.643,59.72 ; 87.643,61.769 87.643,61.955 ; 87.643,62.353 87.643,62.59 ; 87.643,64.588 87.643,64.723 ; 87.643,64.944 87.643,65.282 ; 87.643,65.655 87.643,65.79 ; 87.643,66.087 87.643,66.349 ; 87.643,67.306 87.643,67.898 ; 87.643,67.966 87.643,68.127 ; 87.643,68.677 87.643,68.965 ; 87.643,70.532 87.643,70.692 ; 87.668,43.455 87.668,43.641 ; 87.668,44.09 87.668,44.327 ; 87.668,46.198 87.668,46.308 ; 87.668,47.24 87.668,47.375 ; 87.668,49.119 87.668,49.255 ; 87.668,49.424 87.668,49.483 ; 87.668,49.602 87.668,49.814 ; 87.668,49.958 87.668,50.347 ; 87.668,50.466 87.668,50.601 ; 87.668,51.024 87.668,51.236 ; 87.668,52.574 87.668,52.76 ; 87.668,52.904 87.668,53.319 ; 87.668,53.641 87.668,54.03 ; 87.668,58.594 87.668,58.754 ; 87.668,59.33 87.668,59.72 ; 87.668,61.743 87.668,61.929 ; 87.668,62.378 87.668,62.615 ; 87.668,64.588 87.668,64.723 ; 87.668,64.944 87.668,65.282 ; 87.668,65.655 87.668,65.79 ; 87.668,66.112 87.668,66.349 ; 87.668,67.306 87.668,67.822 ; 87.668,67.941 87.668,68.102 ; 87.668,68.703 87.668,68.991 ; 87.668,70.532 87.668,70.692 ; 87.694,43.455 87.694,43.616 ; 87.694,44.116 87.694,44.378 ; 87.694,46.198 87.694,46.308 ; 87.694,47.24 87.694,47.401 ; 87.694,49.119 87.694,49.255 ; 87.694,49.424 87.694,49.483 ; 87.694,49.627 87.694,49.814 ; 87.694,50.008 87.694,50.195 ; 87.694,50.44 87.694,50.601 ; 87.694,51.024 87.694,51.236 ; 87.694,52.599 87.694,52.76 ; 87.694,52.929 87.694,53.319 ; 87.694,53.615 87.694,54.081 ; 87.694,58.594 87.694,58.754 ; 87.694,59.305 87.694,59.72 ; 87.694,61.743 87.694,61.904 ; 87.694,62.404 87.694,62.666 ; 87.694,64.588 87.694,64.723 ; 87.694,64.944 87.694,65.257 ; 87.694,65.655 87.694,65.79 ; 87.694,66.163 87.694,66.324 ; 87.694,67.306 87.694,67.771 ; 87.694,67.941 87.694,68.102 ; 87.694,68.728 87.694,69.041 ; 87.694,70.532 87.694,70.692 ; 87.719,43.43 87.719,43.616 ; 87.719,44.141 87.719,44.403 ; 87.719,46.198 87.719,46.308 ; 87.719,47.265 87.719,47.401 ; 87.719,49.119 87.719,49.255 ; 87.719,49.399 87.719,49.483 ; 87.719,49.627 87.719,49.814 ; 87.719,50.059 87.719,50.169 ; 87.719,50.44 87.719,50.576 ; 87.719,51.024 87.719,51.236 ; 87.719,52.599 87.719,52.76 ; 87.719,52.904 87.719,53.319 ; 87.719,53.59 87.719,54.106 ; 87.719,58.594 87.719,58.729 ; 87.719,59.254 87.719,59.694 ; 87.719,61.718 87.719,61.904 ; 87.719,62.429 87.719,62.691 ; 87.719,64.588 87.719,64.723 ; 87.719,64.918 87.719,65.257 ; 87.719,65.655 87.719,65.79 ; 87.719,66.188 87.719,66.298 ; 87.719,67.306 87.719,67.695 ; 87.719,67.915 87.719,68.051 ; 87.719,68.093 87.719,68.254 ; 87.719,68.754 87.719,69.092 ; 87.719,70.532 87.719,70.692 ; 87.744,43.404 87.744,43.591 ; 87.744,44.166 87.744,44.429 ; 87.744,46.198 87.744,46.308 ; 87.744,47.265 87.744,47.426 ; 87.744,49.119 87.744,49.255 ; 87.744,49.399 87.744,49.483 ; 87.744,49.627 87.744,49.814 ; 87.744,50.059 87.744,50.169 ; 87.744,50.44 87.744,50.576 ; 87.744,51.024 87.744,51.211 ; 87.744,52.599 87.744,52.76 ; 87.744,52.879 87.744,53.319 ; 87.744,53.564 87.744,53.598 ; 87.744,53.742 87.744,54.132 ; 87.744,58.594 87.744,58.729 ; 87.744,59.203 87.744,59.694 ; 87.744,61.692 87.744,61.879 ; 87.744,62.454 87.744,62.717 ; 87.744,64.588 87.744,64.723 ; 87.744,64.918 87.744,65.257 ; 87.744,65.655 87.744,65.79 ; 87.744,66.214 87.744,66.273 ; 87.744,67.331 87.744,67.644 ; 87.744,67.89 87.744,68.025 ; 87.744,68.144 87.744,68.33 ; 87.744,68.804 87.744,69.143 ; 87.744,70.532 87.744,70.692 ; 87.77,43.379 87.77,43.565 ; 87.77,44.192 87.77,44.454 ; 87.77,46.198 87.77,46.308 ; 87.77,47.291 87.77,47.426 ; 87.77,49.119 87.77,49.255 ; 87.77,49.399 87.77,49.458 ; 87.77,49.627 87.77,49.814 ; 87.77,50.034 87.77,50.169 ; 87.77,50.44 87.77,50.576 ; 87.77,51.024 87.77,51.211 ; 87.77,52.599 87.77,52.76 ; 87.77,52.853 87.77,52.989 ; 87.77,53.158 87.77,53.293 ; 87.77,53.539 87.77,53.573 ; 87.77,53.793 87.77,54.157 ; 87.77,58.594 87.77,58.729 ; 87.77,59.178 87.77,59.694 ; 87.77,61.667 87.77,61.853 ; 87.77,62.48 87.77,62.742 ; 87.77,64.588 87.77,64.723 ; 87.77,64.918 87.77,65.231 ; 87.77,65.655 87.77,65.79 ; 87.77,67.357 87.77,67.568 ; 87.77,67.89 87.77,68.025 ; 87.77,68.144 87.77,68.356 ; 87.77,68.83 87.77,69.219 ; 87.77,70.532 87.77,70.692 ; 87.795,43.354 87.795,43.54 ; 87.795,44.217 87.795,44.48 ; 87.795,46.198 87.795,46.308 ; 87.795,47.291 87.795,47.451 ; 87.795,49.119 87.795,49.229 ; 87.795,49.373 87.795,49.458 ; 87.795,49.627 87.795,49.788 ; 87.795,50.034 87.795,50.144 ; 87.795,50.44 87.795,50.55 ; 87.795,51.024 87.795,51.211 ; 87.795,52.625 87.795,52.76 ; 87.795,52.802 87.795,52.938 ; 87.795,53.158 87.795,53.243 ; 87.795,53.514 87.795,53.547 ; 87.795,53.844 87.795,54.182 ; 87.795,58.594 87.795,58.729 ; 87.795,59.254 87.795,59.694 ; 87.795,61.642 87.795,61.828 ; 87.795,62.505 87.795,62.768 ; 87.795,64.588 87.795,64.723 ; 87.795,64.918 87.795,65.231 ; 87.795,65.655 87.795,65.79 ; 87.795,67.407 87.795,67.492 ; 87.795,67.865 87.795,68 ; 87.795,68.169 87.795,68.356 ; 87.795,68.855 87.795,69.295 ; 87.795,70.532 87.795,70.692 ; 87.82,43.328 87.82,43.514 ; 87.82,44.217 87.82,44.53 ; 87.82,46.198 87.82,46.308 ; 87.82,46.656 87.82,46.664 ; 87.82,47.316 87.82,47.477 ; 87.82,49.119 87.82,49.229 ; 87.82,49.373 87.82,49.458 ; 87.82,49.627 87.82,49.788 ; 87.82,50.008 87.82,50.195 ; 87.82,50.415 87.82,50.55 ; 87.82,51.024 87.82,51.211 ; 87.82,52.625 87.82,52.887 ; 87.82,53.133 87.82,53.293 ; 87.82,53.514 87.82,53.547 ; 87.82,53.869 87.82,54.208 ; 87.82,58.594 87.82,58.729 ; 87.82,59.33 87.82,59.669 ; 87.82,61.616 87.82,61.802 ; 87.82,62.505 87.82,62.818 ; 87.82,64.588 87.82,64.723 ; 87.82,64.944 87.82,65.206 ; 87.82,65.655 87.82,65.79 ; 87.82,67.865 87.82,67.975 ; 87.82,68.169 87.82,68.356 ; 87.82,68.906 87.82,69.397 ; 87.82,70.532 87.82,70.692 ; 87.846,43.303 87.846,43.489 ; 87.846,44.243 87.846,44.556 ; 87.846,46.198 87.846,46.283 ; 87.846,46.63 87.846,46.664 ; 87.846,47.341 87.846,47.502 ; 87.846,48.002 87.846,48.01 ; 87.846,49.119 87.846,49.229 ; 87.846,49.348 87.846,49.458 ; 87.846,49.627 87.846,49.788 ; 87.846,50.008 87.846,50.296 ; 87.846,50.415 87.846,50.55 ; 87.846,51.024 87.846,51.185 ; 87.846,52.65 87.846,52.811 ; 87.846,53.158 87.846,53.37 ; 87.846,53.488 87.846,53.547 ; 87.846,53.92 87.846,54.208 ; 87.846,58.594 87.846,58.729 ; 87.846,59.432 87.846,59.669 ; 87.846,61.591 87.846,61.777 ; 87.846,62.531 87.846,62.844 ; 87.846,64.588 87.846,64.723 ; 87.846,64.969 87.846,65.206 ; 87.846,65.655 87.846,65.79 ; 87.846,67.839 87.846,67.949 ; 87.846,68.195 87.846,68.356 ; 87.846,68.931 87.846,69.473 ; 87.846,70.532 87.846,70.692 ; 87.871,43.277 87.871,43.464 ; 87.871,44.268 87.871,44.607 ; 87.871,46.198 87.871,46.283 ; 87.871,46.63 87.871,46.664 ; 87.871,47.341 87.871,47.502 ; 87.871,48.002 87.871,48.01 ; 87.871,49.119 87.871,49.229 ; 87.871,49.348 87.871,49.433 ; 87.871,49.627 87.871,49.788 ; 87.871,50.008 87.871,50.322 ; 87.871,50.415 87.871,50.652 ; 87.871,51.024 87.871,51.185 ; 87.871,52.65 87.871,52.76 ; 87.871,53.209 87.871,53.42 ; 87.871,53.463 87.871,53.547 ; 87.871,53.971 87.871,54.233 ; 87.871,58.594 87.871,58.729 ; 87.871,59.457 87.871,59.669 ; 87.871,61.565 87.871,61.752 ; 87.871,62.556 87.871,62.895 ; 87.871,64.588 87.871,64.723 ; 87.871,64.969 87.871,65.181 ; 87.871,65.68 87.871,65.79 ; 87.871,67.788 87.871,67.949 ; 87.871,68.195 87.871,68.381 ; 87.871,68.957 87.871,69.524 ; 87.871,70.532 87.871,70.667 ; 87.897,43.252 87.897,43.438 ; 87.897,44.293 87.897,44.632 ; 87.897,46.198 87.897,46.283 ; 87.897,46.605 87.897,46.664 ; 87.897,47.367 87.897,47.528 ; 87.897,48.002 87.897,48.01 ; 87.897,49.094 87.897,49.229 ; 87.897,49.348 87.897,49.433 ; 87.897,49.627 87.897,49.788 ; 87.897,49.983 87.897,50.525 ; 87.897,50.567 87.897,50.728 ; 87.897,51.024 87.897,51.185 ; 87.897,52.726 87.897,52.76 ; 87.897,53.234 87.897,53.547 ; 87.897,53.996 87.897,54.233 ; 87.897,58.594 87.897,58.729 ; 87.897,59.483 87.897,59.643 ; 87.897,61.54 87.897,61.726 ; 87.897,62.581 87.897,62.92 ; 87.897,64.588 87.897,64.723 ; 87.897,64.994 87.897,65.155 ; 87.897,65.68 87.897,65.79 ; 87.897,67.763 87.897,67.924 ; 87.897,68.195 87.897,68.381 ; 87.897,69.008 87.897,69.549 ; 87.897,70.532 87.897,70.642 ; 87.922,43.227 87.922,43.413 ; 87.922,44.319 87.922,44.657 ; 87.922,46.198 87.922,46.283 ; 87.922,46.579 87.922,46.664 ; 87.922,47.367 87.922,47.553 ; 87.922,49.094 87.922,49.229 ; 87.922,49.348 87.922,49.433 ; 87.922,49.627 87.922,49.788 ; 87.922,49.958 87.922,50.068 ; 87.922,50.161 87.922,50.499 ; 87.922,50.593 87.922,50.83 ; 87.922,51.024 87.922,51.185 ; 87.922,52.726 87.922,52.785 ; 87.922,53.26 87.922,53.547 ; 87.922,54.047 87.922,54.233 ; 87.922,58.619 87.922,58.729 ; 87.922,59.508 87.922,59.643 ; 87.922,61.515 87.922,61.701 ; 87.922,62.607 87.922,62.945 ; 87.922,64.588 87.922,64.723 ; 87.922,65.02 87.922,65.13 ; 87.922,65.68 87.922,65.79 ; 87.922,67.738 87.922,67.898 ; 87.922,68.195 87.922,68.381 ; 87.922,69.058 87.922,69.575 ; 87.922,70.532 87.922,70.591 ; 87.947,43.201 87.947,43.413 ; 87.947,44.344 87.947,44.683 ; 87.947,46.198 87.947,46.283 ; 87.947,46.554 87.947,46.664 ; 87.947,47.392 87.947,47.553 ; 87.947,48.027 87.947,48.036 ; 87.947,49.094 87.947,49.229 ; 87.947,49.323 87.947,49.433 ; 87.947,49.627 87.947,49.788 ; 87.947,49.958 87.947,50.068 ; 87.947,50.186 87.947,50.499 ; 87.947,50.618 87.947,50.855 ; 87.947,51.024 87.947,51.185 ; 87.947,52.752 87.947,52.785 ; 87.947,53.285 87.947,53.547 ; 87.947,54.072 87.947,54.233 ; 87.947,58.619 87.947,58.729 ; 87.947,59.508 87.947,59.618 ; 87.947,61.489 87.947,61.701 ; 87.947,62.632 87.947,62.971 ; 87.947,64.563 87.947,64.723 ; 87.947,65.02 87.947,65.104 ; 87.947,65.68 87.947,65.79 ; 87.947,67.712 87.947,67.873 ; 87.947,68.195 87.947,68.381 ; 87.947,69.109 87.947,69.626 ; 87.947,70.532 87.947,70.54 ; 87.973,43.176 87.973,43.387 ; 87.973,44.37 87.973,44.708 ; 87.973,46.198 87.973,46.283 ; 87.973,46.529 87.973,46.639 ; 87.973,47.418 87.973,47.578 ; 87.973,48.027 87.973,48.036 ; 87.973,49.094 87.973,49.229 ; 87.973,49.323 87.973,49.433 ; 87.973,49.627 87.973,49.788 ; 87.973,49.932 87.973,50.042 ; 87.973,50.186 87.973,50.474 ; 87.973,50.643 87.973,50.906 ; 87.973,51.024 87.973,51.16 ; 87.973,52.752 87.973,52.785 ; 87.973,53.31 87.973,53.547 ; 87.973,54.098 87.973,54.233 ; 87.973,58.619 87.973,58.729 ; 87.973,59.533 87.973,59.618 ; 87.973,61.464 87.973,61.675 ; 87.973,62.658 87.973,62.996 ; 87.973,64.563 87.973,64.723 ; 87.973,65.045 87.973,65.104 ; 87.973,65.68 87.973,65.79 ; 87.973,67.687 87.973,67.873 ; 87.973,68.195 87.973,68.381 ; 87.973,68.957 87.973,68.965 ; 87.973,69.16 87.973,69.676 ; 87.998,43.15 87.998,43.337 ; 87.998,44.395 87.998,44.759 ; 87.998,46.198 87.998,46.283 ; 87.998,46.503 87.998,46.639 ; 87.998,47.418 87.998,47.578 ; 87.998,48.027 87.998,48.112 ; 87.998,49.094 87.998,49.229 ; 87.998,49.323 87.998,49.433 ; 87.998,49.627 87.998,49.788 ; 87.998,49.907 87.998,50.017 ; 87.998,50.237 87.998,50.474 ; 87.998,50.669 87.998,50.931 ; 87.998,51.024 87.998,51.16 ; 87.998,52.752 87.998,52.811 ; 87.998,53.31 87.998,53.573 ; 87.998,54.149 87.998,54.208 ; 87.998,55.368 87.998,55.376 ; 87.998,58.619 87.998,58.729 ; 87.998,61.438 87.998,61.625 ; 87.998,62.683 87.998,63.047 ; 87.998,64.563 87.998,64.698 ; 87.998,65.68 87.998,65.79 ; 87.998,67.687 87.998,67.848 ; 87.998,68.195 87.998,68.381 ; 87.998,68.83 87.998,69.067 ; 87.998,69.211 87.998,69.676 ; 88.024,43.15 88.024,43.311 ; 88.024,44.42 88.024,44.784 ; 88.024,46.173 88.024,46.283 ; 88.024,46.478 88.024,46.613 ; 88.024,47.443 88.024,47.604 ; 88.024,48.027 88.024,48.112 ; 88.024,49.094 88.024,49.229 ; 88.024,49.297 88.024,49.433 ; 88.024,49.627 88.024,49.788 ; 88.024,49.881 88.024,49.991 ; 88.024,50.288 88.024,50.449 ; 88.024,50.669 88.024,50.957 ; 88.024,51.024 88.024,51.16 ; 88.024,52.752 88.024,52.811 ; 88.024,53.336 88.024,53.573 ; 88.024,54.149 88.024,54.208 ; 88.024,55.342 88.024,55.402 ; 88.024,58.619 88.024,58.729 ; 88.024,61.438 88.024,61.599 ; 88.024,62.708 88.024,63.072 ; 88.024,64.563 88.024,64.698 ; 88.024,65.68 88.024,65.79 ; 88.024,67.636 88.024,67.822 ; 88.024,68.22 88.024,68.381 ; 88.024,68.906 88.024,69.118 ; 88.024,69.287 88.024,69.676 ; 88.049,43.125 88.049,43.26 ; 88.049,44.446 88.049,44.835 ; 88.049,46.173 88.049,46.283 ; 88.049,46.452 88.049,46.588 ; 88.049,47.443 88.049,47.629 ; 88.049,48.002 88.049,48.112 ; 88.049,49.094 88.049,49.229 ; 88.049,49.297 88.049,49.407 ; 88.049,49.627 88.049,49.788 ; 88.049,49.856 88.049,49.966 ; 88.049,50.313 88.049,50.449 ; 88.049,50.694 88.049,50.957 ; 88.049,50.999 88.049,51.16 ; 88.049,52.371 88.049,52.379 ; 88.049,52.752 88.049,52.811 ; 88.049,53.361 88.049,53.7 ; 88.049,54.174 88.049,54.182 ; 88.049,55.292 88.049,55.452 ; 88.049,58.619 88.049,58.729 ; 88.049,61.413 88.049,61.548 ; 88.049,62.734 88.049,63.123 ; 88.049,64.563 88.049,64.698 ; 88.049,65.68 88.049,65.79 ; 88.049,67.611 88.049,67.822 ; 88.049,68.22 88.049,68.381 ; 88.049,68.931 88.049,69.168 ; 88.049,69.363 88.049,69.626 ; 88.075,43.1 88.075,43.235 ; 88.075,44.497 88.075,44.861 ; 88.075,46.173 88.075,46.283 ; 88.075,46.427 88.075,46.588 ; 88.075,47.468 88.075,47.655 ; 88.075,48.002 88.075,48.137 ; 88.075,49.094 88.075,49.229 ; 88.075,49.297 88.075,49.407 ; 88.075,49.627 88.075,49.941 ; 88.075,50.313 88.075,50.423 ; 88.075,50.72 88.075,50.957 ; 88.075,50.999 88.075,51.134 ; 88.075,52.345 88.075,52.354 ; 88.075,52.752 88.075,52.836 ; 88.075,53.412 88.075,53.751 ; 88.075,55.266 88.075,55.478 ; 88.075,58.619 88.075,58.729 ; 88.075,61.388 88.075,61.523 ; 88.075,62.785 88.075,63.149 ; 88.075,64.563 88.075,64.698 ; 88.075,65.68 88.075,65.79 ; 88.075,67.585 88.075,67.848 ; 88.075,68.22 88.075,68.381 ; 88.075,68.957 88.075,69.194 ; 88.1,43.049 88.1,43.21 ; 88.1,44.522 88.1,44.911 ; 88.1,46.173 88.1,46.283 ; 88.1,46.402 88.1,46.562 ; 88.1,47.494 88.1,47.655 ; 88.1,48.002 88.1,48.137 ; 88.1,49.094 88.1,49.229 ; 88.1,49.297 88.1,49.407 ; 88.1,49.627 88.1,49.788 ; 88.1,49.856 88.1,49.89 ; 88.1,50.288 88.1,50.398 ; 88.1,50.77 88.1,50.957 ; 88.1,50.999 88.1,51.134 ; 88.1,52.294 88.1,52.328 ; 88.1,52.777 88.1,52.836 ; 88.1,53.463 88.1,53.522 ; 88.1,53.615 88.1,53.776 ; 88.1,55.241 88.1,55.503 ; 88.1,58.619 88.1,58.729 ; 88.1,61.337 88.1,61.498 ; 88.1,62.81 88.1,63.199 ; 88.1,64.563 88.1,64.698 ; 88.1,65.68 88.1,65.79 ; 88.1,67.534 88.1,67.746 ; 88.1,67.788 88.1,67.848 ; 88.1,68.22 88.1,68.381 ; 88.1,68.525 88.1,68.61 ; 88.1,68.982 88.1,69.245 ; 88.125,43.023 88.125,43.159 ; 88.125,44.547 88.125,44.937 ; 88.125,46.173 88.125,46.283 ; 88.125,46.376 88.125,46.537 ; 88.125,47.494 88.125,47.68 ; 88.125,48.002 88.125,48.137 ; 88.125,49.094 88.125,49.229 ; 88.125,49.272 88.125,49.407 ; 88.125,49.627 88.125,49.763 ; 88.125,50.262 88.125,50.372 ; 88.125,50.796 88.125,50.931 ; 88.125,50.999 88.125,51.134 ; 88.125,52.218 88.125,52.303 ; 88.125,52.777 88.125,52.836 ; 88.125,53.666 88.125,53.827 ; 88.125,55.215 88.125,55.529 ; 88.125,58.619 88.125,58.729 ; 88.125,61.311 88.125,61.447 ; 88.125,62.835 88.125,63.225 ; 88.125,64.537 88.125,64.698 ; 88.125,65.68 88.125,65.79 ; 88.125,67.484 88.125,67.721 ; 88.125,67.788 88.125,67.873 ; 88.125,68.22 88.125,68.381 ; 88.125,68.576 88.125,68.737 ; 88.125,69.033 88.125,69.27 ; 88.125,70.582 88.125,70.642 ; 88.151,42.973 88.151,43.108 ; 88.151,44.573 88.151,44.988 ; 88.151,46.148 88.151,46.283 ; 88.151,46.351 88.151,46.537 ; 88.151,47.519 88.151,47.705 ; 88.151,48.002 88.151,48.137 ; 88.151,49.094 88.151,49.229 ; 88.151,49.272 88.151,49.407 ; 88.151,49.627 88.151,49.763 ; 88.151,50.212 88.151,50.347 ; 88.151,50.821 88.151,50.931 ; 88.151,50.999 88.151,51.109 ; 88.151,52.193 88.151,52.303 ; 88.151,52.777 88.151,52.862 ; 88.151,53.691 88.151,53.852 ; 88.151,55.215 88.151,55.529 ; 88.151,58.619 88.151,58.729 ; 88.151,61.261 88.151,61.396 ; 88.151,62.861 88.151,63.276 ; 88.151,64.537 88.151,64.698 ; 88.151,65.68 88.151,65.79 ; 88.151,67.433 88.151,67.67 ; 88.151,67.788 88.151,67.898 ; 88.151,68.22 88.151,68.356 ; 88.151,68.601 88.151,68.787 ; 88.151,69.058 88.151,69.27 ; 88.151,70.557 88.151,70.667 ; 88.176,42.973 88.176,42.981 ; 88.176,44.649 88.176,45.013 ; 88.176,46.148 88.176,46.283 ; 88.176,46.325 88.176,46.512 ; 88.176,47.519 88.176,47.705 ; 88.176,47.976 88.176,48.137 ; 88.176,49.094 88.176,49.407 ; 88.176,49.627 88.176,49.763 ; 88.176,50.237 88.176,50.322 ; 88.176,50.872 88.176,50.906 ; 88.176,50.974 88.176,51.109 ; 88.176,52.193 88.176,52.277 ; 88.176,52.802 88.176,52.887 ; 88.176,53.717 88.176,53.878 ; 88.176,55.19 88.176,55.554 ; 88.176,58.594 88.176,58.729 ; 88.176,61.261 88.176,61.269 ; 88.176,62.937 88.176,63.301 ; 88.176,64.537 88.176,64.698 ; 88.176,65.68 88.176,65.79 ; 88.176,67.357 88.176,67.644 ; 88.176,67.788 88.176,67.924 ; 88.176,68.22 88.176,68.356 ; 88.176,68.627 88.176,68.813 ; 88.176,69.058 88.176,69.295 ; 88.176,70.532 88.176,70.667 ; 88.201,44.7 88.201,45.064 ; 88.201,46.122 88.201,46.486 ; 88.201,47.545 88.201,47.731 ; 88.201,47.976 88.201,48.137 ; 88.201,49.094 88.201,49.382 ; 88.201,49.627 88.201,49.763 ; 88.201,50.974 88.201,51.109 ; 88.201,52.193 88.201,52.277 ; 88.201,52.802 88.201,52.912 ; 88.201,53.742 88.201,53.903 ; 88.201,55.19 88.201,55.554 ; 88.201,58.568 88.201,58.729 ; 88.201,59.762 88.201,60.024 ; 88.201,62.988 88.201,63.352 ; 88.201,64.512 88.201,64.698 ; 88.201,65.655 88.201,65.79 ; 88.201,67.458 88.201,67.568 ; 88.201,67.788 88.201,67.924 ; 88.201,68.195 88.201,68.356 ; 88.201,68.652 88.201,68.838 ; 88.201,69.084 88.201,69.295 ; 88.201,70.506 88.201,70.692 ; 88.227,44.751 88.227,45.089 ; 88.227,46.122 88.227,46.461 ; 88.227,47.57 88.227,47.756 ; 88.227,47.976 88.227,48.137 ; 88.227,49.094 88.227,49.382 ; 88.227,49.627 88.227,49.763 ; 88.227,50.974 88.227,51.109 ; 88.227,52.193 88.227,52.277 ; 88.227,52.802 88.227,52.938 ; 88.227,53.742 88.227,53.928 ; 88.227,55.215 88.227,55.579 ; 88.227,58.543 88.227,58.729 ; 88.227,59.203 88.227,60.151 ; 88.227,63.039 88.227,63.377 ; 88.227,64.512 88.227,64.698 ; 88.227,65.655 88.227,65.79 ; 88.227,67.814 88.227,67.949 ; 88.227,68.195 88.227,68.356 ; 88.227,68.677 88.227,68.838 ; 88.227,69.109 88.227,69.295 ; 88.227,70.481 88.227,70.718 ; 88.252,44.801 88.252,45.115 ; 88.252,46.097 88.252,46.461 ; 88.252,47.595 88.252,47.782 ; 88.252,47.951 88.252,48.137 ; 88.252,49.094 88.252,49.382 ; 88.252,49.627 88.252,49.763 ; 88.252,50.948 88.252,51.109 ; 88.252,52.218 88.252,52.303 ; 88.252,52.828 88.252,52.963 ; 88.252,53.768 88.252,53.954 ; 88.252,55.241 88.252,55.579 ; 88.252,58.517 88.252,58.729 ; 88.252,59.051 88.252,60.228 ; 88.252,63.089 88.252,63.403 ; 88.252,64.486 88.252,64.698 ; 88.252,65.655 88.252,65.79 ; 88.252,67.814 88.252,67.975 ; 88.252,68.195 88.252,68.356 ; 88.252,68.677 88.252,68.838 ; 88.252,69.135 88.252,69.295 ; 88.252,70.43 88.252,70.743 ; 88.278,44.928 88.278,45.115 ; 88.278,46.071 88.278,46.435 ; 88.278,47.595 88.278,47.782 ; 88.278,47.926 88.278,48.163 ; 88.278,49.094 88.278,49.382 ; 88.278,49.627 88.278,49.763 ; 88.278,50.948 88.278,51.084 ; 88.278,52.218 88.278,52.303 ; 88.278,52.828 88.278,52.963 ; 88.278,53.793 88.278,53.979 ; 88.278,55.266 88.278,55.554 ; 88.278,58.517 88.278,58.729 ; 88.278,58.848 88.278,60.253 ; 88.278,63.216 88.278,63.403 ; 88.278,64.486 88.278,64.673 ; 88.278,65.655 88.278,65.79 ; 88.278,67.814 88.278,68 ; 88.278,68.195 88.278,68.356 ; 88.278,68.703 88.278,68.838 ; 88.278,69.185 88.278,69.27 ; 88.278,70.455 88.278,70.718 ; 88.303,46.071 88.303,46.41 ; 88.303,47.621 88.303,47.807 ; 88.303,47.926 88.303,48.163 ; 88.303,49.094 88.303,49.382 ; 88.303,49.627 88.303,49.763 ; 88.303,50.948 88.303,51.084 ; 88.303,52.218 88.303,52.328 ; 88.303,52.853 88.303,52.989 ; 88.303,53.818 88.303,53.979 ; 88.303,55.292 88.303,55.529 ; 88.303,58.517 88.303,60.278 ; 88.303,64.512 88.303,64.673 ; 88.303,65.655 88.303,65.79 ; 88.303,67.839 88.303,68